# EAGLE board TinkercadIOT Final Project (EAGLE 9.7.0)

Size 270.84 x 179.86 mm. Coordinates in mm from the lower left corner, seen from the top.
Outline: 0,0 270.84,0 270.84,179.86 0,179.86 0,0
Copper layers (1*16): Top 0.035mm / dielectric 1.5mm / Bottom 0.035mm
Design rules "default": minimum track width 6mil, minimum drill 0.35mm, track to track 6mil, track to pad 6mil, pad to pad 6mil, via to via 6mil, smd to smd 6mil, copper to edge 40mil, drill to drill 6mil, minimum pad ring 10mil, minimum via ring 8mil, stop-mask expansion 4mil, vias tented up to drill 0mil, thermal gap 10mil

## Footprints (pad centres in the part's own frame; a part is rotated, then mirrored left to right if it is on the bottom)
LU-5-R = drill 0.8: 1 -6.35,-3.81; 5 3.81,-3.81; 6 6.35,-3.81; 7 6.35,3.81; 8 3.81,3.81; 12 -6.35,3.81
1X02 = drill 1.016 long: 1 -1.27,0; 2 1.27,0
MOTOR = drill 1.118 pad 3.15 octagon: + 2.54,0; - -2.54,0
DG01D = drill 1.118 pad 3.15 octagon: + 2.54,0; - -2.54,0
BATTERY-GENERIC = drill 1.118 pad 3.15 octagon: + 2.54,0; - -2.54,0
SWITCH-MOMENTARY-PTH-6.5MM = drill 1.016 pad 1.88: 1 -3.251,2.261; 2 3.251,2.261; 3 -3.251,-2.261; 4 3.251,-2.261
ARDUINO-UNO-R3-SHIELD = drill 1.016 pad 1.88: 3.3V 24.13,-2.54; 5V 24.13,0; A0 24.13,12.7; A1 24.13,15.24; A2 24.13,17.78; A3 24.13,20.32; A4 24.13,22.86; A5 24.13,25.4; AREF -24.13,-13.97; D2 -24.13,20.32; D3 -24.13,17.78; D4 -24.13,15.24; D5 -24.13,12.7; D6 -24.13,10.16; D7 -24.13,7.62; D8 -24.13,3.81; D9 -24.13,1.27; D10 -24.13,-1.27; D11 -24.13,-3.81; D12 -24.13,-6.35; D13 -24.13,-8.89; GND@0 24.13,2.54; GND@1 24.13,5.08; GND@2 -24.13,-11.43; IOREF 24.13,-7.62; NC 24.13,-10.16; RES 24.13,-5.08; RX -24.13,25.4; SCL -24.13,-19.05; SDA -24.13,-16.51; TX -24.13,22.86; VIN 24.13,7.62
TSOP48 = drill 0.8: 1 -2.54,0; 2 0,0; 3 2.54,0

## Placement (x,y rotation side)
K1  RELAY-SPDT_LU-5-R  [LU-5-R]  106.93,59.34 180 top
K2  RELAY-SPDT_LU-5-R  [LU-5-R]  151.83,60.7 180 top
K3  RELAY-SPDT_LU-5-R  [LU-5-R]  198.2,60.08 180 top
K4  RELAY-SPDT_LU-5-R  [LU-5-R]  252.98,61.44 180 top
L1  LIGHTBULB  [1X02]  113.1,114.78 0 top
M1  MOTOR_HDR  [MOTOR]  159.18,120.19 0 top
M2  MOTOR_DG01D  [DG01D]  199.13,105.57 180 top
M3  MOTOR_HDR  [MOTOR]  253.56,106.82 0 top
P1  BATTERYGENERIC  [BATTERY-GENERIC]  74.48,127.84 180 top
S1  SWITCH_MOMENTARY  [SWITCH-MOMENTARY-PTH-6.5MM]  105.09,20.7 90 top
S2  SWITCH_MOMENTARY  [SWITCH-MOMENTARY-PTH-6.5MM]  147.22,20.8 90 top
S3  SWITCH_MOMENTARY  [SWITCH-MOMENTARY-PTH-6.5MM]  201.13,18.78 90 top
S4  SWITCH_MOMENTARY  [SWITCH-MOMENTARY-PTH-6.5MM]  243.08,17.03 90 top
U1  ARDUINO-UNO-R3-SHIELD  [ARDUINO-UNO-R3-SHIELD]  29.84,34.52 180 top
U2  IR-RECEIVERTSOP48  [TSOP48]  264.47,21.02 0 top

## Library data of the parts
K1-K4 L1 M1-M3 P1 S1-S4 U1 U2 = Tinkercad

## Nets
L1_2: K1.6 L1.2
M1_+: K2.6 M1.+
M2_+: K3.6 M2.+
M3_+: K4.6 M3.+
P1+: K1.1 K1.12 K2.12 K3.12 K4.12 P1.+
P1-: L1.1 M1.- M2.- M3.- P1.-
U1_5V: U1.5V U2.3
U1_D3: U1.D3 U2.1
U1_D5: S4.3 U1.D5
U1_D6: S3.3 U1.D6
U1_D7: S2.3 U1.D7
U1_D8: S1.3 U1.D8
U1_D9: K4.8 U1.D9
U1_D10: K3.8 U1.D10
U1_D11: K2.8 U1.D11
U1_D12: K1.8 U1.D12
U1_GND: K1.5 K2.5 K3.5 K4.5 S1.2 S2.2 S3.2 S4.2 U1.GND@0 U1.GND@1 U1.GND@2 U2.2

## Tracks (layer width: path | path; a pad name or v marks a point on that pad's centre or on a via)
L1_2  (1 unrouted)
M1_+  (1 unrouted)
M2_+  (1 unrouted)
M3_+  (1 unrouted)
P1+  (5 unrouted)
P1-  (4 unrouted)
U1_5V  (1 unrouted)
U1_D3  (1 unrouted)
U1_D5  (1 unrouted)
U1_D6  (1 unrouted)
U1_D7  (1 unrouted)
U1_D8  (1 unrouted)
U1_D9  (1 unrouted)
U1_D10  (1 unrouted)
U1_D11  (1 unrouted)
U1_D12  (1 unrouted)
U1_GND  (11 unrouted)